# Altium PCB ArgoFC.PcbDoc (part 2 of 5)
Units mm, origin at the board's own origin, x right, y up, seen from the top; angles counter-clockwise.
Board outline 177.8 x 177.8 mm, 4 copper layers (Top Layer, GND Plane, PWR Plane, Bottom Layer), stack 0.603 mm thick; 373 components, 236 nets, 1289 pads, 686 vias.
Unrouted connection lines stored in the file: 16.
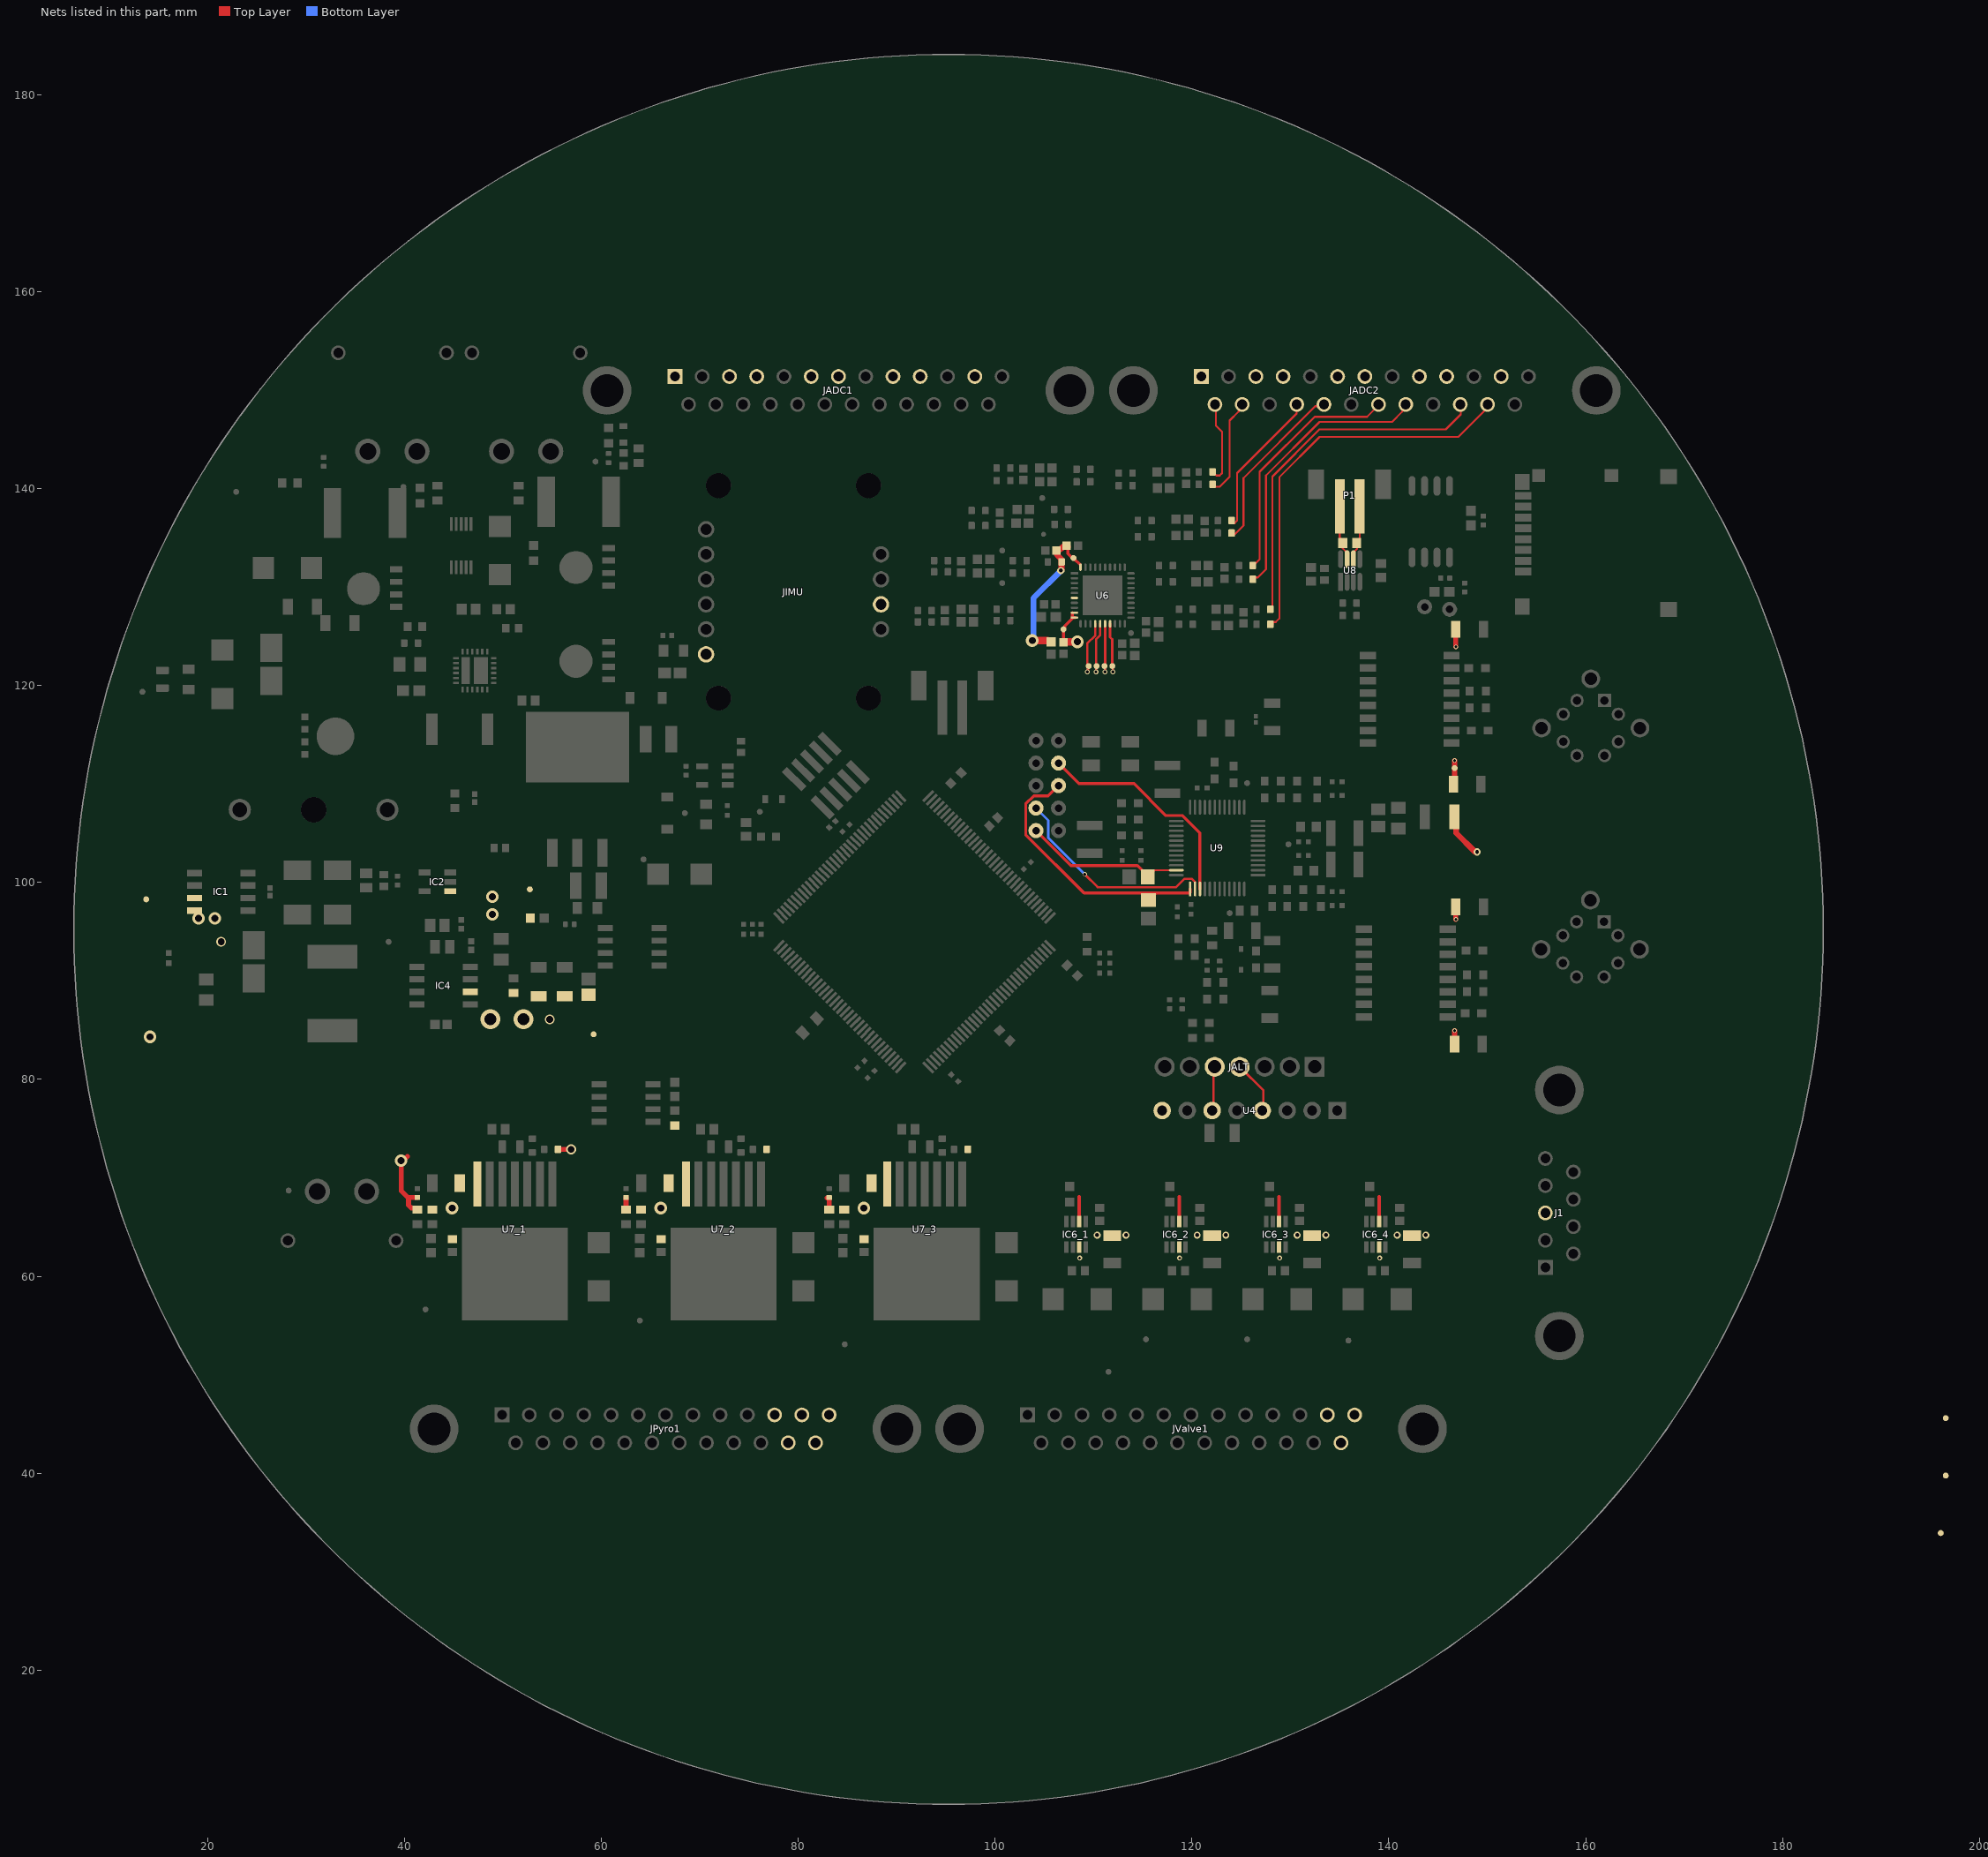
[diagram p4: the nets of this part, all layers, seen from the top]

## Footprints (in the part's own frame and the unit in brackets; to place one, negate y for a bottom-side part, rotate by r counter-clockwise, add the part's x,y. Pads: shape width x height; smd on the part's side, far side on the other; paste and mask are expansions set on the pad) (continued)
KTT0003B_N [mm] "D2-PAK, 3-Leads, Body 10.41x8.89mm, Pitch 2.54mm, IPC Medium Density"
  rect 2.85x1.05 smd: 1(-6.2,2.54) 2(-6.2,0) 3(-6.2,-2.54)
  rect 7.2x10.5 smd: 4(4.55,0)
  silkscreen extent -6.32,-5.2 0,5.2, body extent -6.78,-5.2 7.57,5.2, height 4.64
MCC-DO-214AB-2_V [mil] "Diode, 2-Leads, Body 6.18x6.1mm"
  rect 70x200 smd: 1(-130,0) 2(130,0)
  silkscreen extent -122,-120 185,120, body extent -122,-120 122,120, height 214
MCC-SOD123_V [mil] "SOD123, 2-Leads, Body 2.7x1.6mm, Height 1.35mm"
  rect 35.98x47.99 smd: 1(-64.5,0) 2(64.5,0)
  silkscreen extent 102,-31 102,31, body extent -53,-31 53,31, height 53
MCHP-SOIC-S2A8_M [mm] "SOIC, 8-Leads, Body 5.275x5.275mm, Pitch 1.27mm, IPC Low Density"
  oval 2x0.7 smd: 1(-3.625,1.905) 2(-3.625,0.635) 3(-3.625,-0.635) 4(-3.625,-1.905) 5(3.625,-1.905) 6(3.625,-0.635) 7(3.625,0.635) 8(3.625,1.905)
  silkscreen extent -3.75,-2.7 2.23,2.93, body extent -2.7,-2.7 2.7,2.7, height 2.16
MOLX-502774-0891_V [mm] "SMD, 14-Leads, Body 15x14.3mm, Pitch 1.1mm"
  rect 0.8x1.68 smd: 1(-2.9,7.385) 2(-1.8,7.385) 3(-0.7,7.385) 4(0.4,7.385) 5(1.5,7.385) 6(2.6,7.385) 7(3.7,7.385) 8(4.8,7.385)
  rect 1.29x1.3 smd: 9(6.855,5.825)
  rect 1.29x1.4 smd: 10(6.855,-1.575)
  rect 1.5x1.7 smd: 11(6.75,-7.375) 12(-6.75,-7.375)
  rect 1.7x1.5 smd: 13(-6.45,7.475)
  rect 1.6x1.5 smd: 14(6.21,7.475)
  silkscreen extent -7.15,-7.88 7.15,8.9, body extent -7.15,-8 7.15,8, height 1.78
ONSC-SOIC-8-751-07_V [mm] "SOIC, 8-Leads, Body 4.9x3.9mm, Pitch 1.27mm"
  rect 1.52x0.6 smd: 1(-2.74,1.905) 2(-2.74,0.635) 3(-2.74,-0.635) 4(-2.74,-1.905) 5(2.74,-1.905) 6(2.74,-0.635) 7(2.74,0.635) 8(2.74,1.905)
  silkscreen extent -2.87,-2.45 1.57,2.88, body extent -3,-2.5 3,2.5, height 1.75
QFP50P2200X2200X160-144N [mm]
  rect 1.475x0.3 smd: 1(-10.738,8.75) 2(-10.738,8.25) 3(-10.738,7.75) 4(-10.738,7.25) 5(-10.738,6.75) 6(-10.738,6.25) 7(-10.738,5.75) 8(-10.738,5.25) 9(-10.738,4.75) 10(-10.738,4.25) 11(-10.738,3.75) 12(-10.738,3.25) 13(-10.738,2.75) 14(-10.738,2.25) 15(-10.738,1.75) 16(-10.738,1.25) 17(-10.738,0.75) 18(-10.738,0.25) 19(-10.738,-0.25) 20(-10.738,-0.75) 21(-10.738,-1.25) 22(-10.738,-1.75) 23(-10.738,-2.25) 24(-10.738,-2.75) 25(-10.738,-3.25) 26(-10.738,-3.75) 27(-10.738,-4.25) 28(-10.738,-4.75) 29(-10.738,-5.25) 30(-10.738,-5.75) 31(-10.738,-6.25) 32(-10.738,-6.75) 33(-10.738,-7.25) 34(-10.738,-7.75) 35(-10.738,-8.25) 36(-10.738,-8.75) 73(10.738,-8.75) 74(10.738,-8.25) 75(10.738,-7.75) 76(10.738,-7.25) 77(10.738,-6.75) 78(10.738,-6.25) 79(10.738,-5.75) 80(10.738,-5.25) 81(10.738,-4.75) 82(10.738,-4.25) 83(10.738,-3.75) 84(10.738,-3.25) 85(10.738,-2.75) 86(10.738,-2.25) 87(10.738,-1.75) 88(10.738,-1.25) 89(10.738,-0.75) 90(10.738,-0.25) 91(10.738,0.25) 92(10.738,0.75) 93(10.738,1.25) 94(10.738,1.75) 95(10.738,2.25) 96(10.738,2.75) 97(10.738,3.25) 98(10.738,3.75) 99(10.738,4.25) 100(10.738,4.75) 101(10.738,5.25) 102(10.738,5.75) 103(10.738,6.25) 104(10.738,6.75) 105(10.738,7.25) 106(10.738,7.75) 107(10.738,8.25) 108(10.738,8.75)
  rect 0.3x1.475 smd: 37(-8.75,-10.738) 38(-8.25,-10.738) 39(-7.75,-10.738) 40(-7.25,-10.738) 41(-6.75,-10.738) 42(-6.25,-10.738) 43(-5.75,-10.738) 44(-5.25,-10.738) 45(-4.75,-10.738) 46(-4.25,-10.738) 47(-3.75,-10.738) 48(-3.25,-10.738) 49(-2.75,-10.738) 50(-2.25,-10.738) 51(-1.75,-10.738) 52(-1.25,-10.738) 53(-0.75,-10.738) 54(-0.25,-10.738) 55(0.25,-10.738) 56(0.75,-10.738) 57(1.25,-10.738) 58(1.75,-10.738) 59(2.25,-10.738) 60(2.75,-10.738) 61(3.25,-10.738) 62(3.75,-10.738) 63(4.25,-10.738) 64(4.75,-10.738) 65(5.25,-10.738) 66(5.75,-10.738) 67(6.25,-10.738) 68(6.75,-10.738) 69(7.25,-10.738) 70(7.75,-10.738) 71(8.25,-10.738) 72(8.75,-10.738) 109(8.75,10.738) 110(8.25,10.738) 111(7.75,10.738) 112(7.25,10.738) 113(6.75,10.738) 114(6.25,10.738) 115(5.75,10.738) 116(5.25,10.738) 117(4.75,10.738) 118(4.25,10.738) 119(3.75,10.738) 120(3.25,10.738) 121(2.75,10.738) 122(2.25,10.738) 123(1.75,10.738) 124(1.25,10.738) 125(0.75,10.738) 126(0.25,10.738) 127(-0.25,10.738) 128(-0.75,10.738) 129(-1.25,10.738) 130(-1.75,10.738) 131(-2.25,10.738) 132(-2.75,10.738) 133(-3.25,10.738) 134(-3.75,10.738) 135(-4.25,10.738) 136(-4.75,10.738) 137(-5.25,10.738) 138(-5.75,10.738) 139(-6.25,10.738) 140(-6.75,10.738) 141(-7.25,10.738) 142(-7.75,10.738) 143(-8.25,10.738) 144(-8.75,10.738)
  silkscreen extent -11.35,-9.65 9.65,9.65, body extent -10.95,-10.95 10.95,10.95, height 1.6
QTB-QBLP595_V [mm] "SMD, 2-Leads, Body 1x0.5mm"
  rrect25% 0.5x0.55 smd: 1(-0.455,0) 2(0.455,0)
  silkscreen extent -0.9,-0.2 -0.9,0.2, body extent -0.5,-0.25 0.5,0.25, height 0.5
RESC0402(1005)_L [mm] "Chip Resistor, Body 1.0x0.5mm, IPC High Density"
  rrect25% 0.5x0.55 smd: 1(-0.45,0) 2(0.45,0)
  silkscreen extent 0,-0.2 0,0.2, body extent -0.5,-0.25 0.5,0.25, height 0.3
RESC0603(1608)_L [mm] "Chip Resistor, Body 1.6x0.8mm, IPC High Density"
  rrect25% 0.66x0.76 smd: 1(-0.7,0) 2(0.7,0)
  silkscreen extent 0,-0.3 0,0.3, body extent -0.8,-0.4 0.8,0.4, height 0.45
RESC0805(2012)_L [mm] "Chip Resistor, Body 2.0x1.3mm, IPC High Density"
  rrect25% 0.76x1.3 smd: 1(-0.9,0) 2(0.89,0)
  silkscreen extent -0.3,-0.55 0.3,0.55, body extent -1,-0.62 1,0.63, height 0.6
RESC1608X55N [mm]
  rect 0.9x0.95 smd: 1(-0.8,0) 2(0.8,0)
  silkscreen extent 0,-0.3 0,0.3, body extent -0.8,-0.4 0.8,0.4, height 0.55
RESC1608X55X25ML10T15 [mm] "Chip Resistor, 2-Leads, Body 1.70x0.90mm, IPC Low Density"
  rect 0.8x1 smd: 1(-0.75,0) 2(0.75,0)
  body extent -0.85,-0.45 0.85,0.45, height 0.55
RESC1608X55X30ML20T20 [mm] "Chip Resistor, 2-Leads, Body 1.60x0.80mm, IPC Low Density"
  rect 1x1.1 smd: 1(-0.7,0) 2(0.7,0)
  body extent -0.9,-0.5 0.9,0.5, height 0.55
RESC1609X50X30LL10T20 [mm] "Chip Resistor, 2-Leads, Body 1.55x0.85mm, IPC High Density"
  rect 0.7x0.85 smd: 1(-0.575,0) 2(0.575,0)
  body extent -0.82,-0.48 0.82,0.48, height 0.5
RESC1609X50X30ML08T20 [mm] "Chip Resistor, 2-Leads, Body 1.65x0.95mm, IPC Low Density"
  rect 0.9x1.05 smd: 1(-0.7,0) 2(0.7,0)
  body extent -0.82,-0.48 0.82,0.48, height 0.5
RESC1609X50X30ML10T20 [mm] "Chip Resistor, 2-Leads, Body 1.55x0.85mm, IPC Low Density"
  rect 0.9x1.05 smd: 1(-0.675,0) 2(0.675,0)
  body extent -0.82,-0.48 0.82,0.48, height 0.5
RESC1609X55X30LL15T15 [mm] "Chip Resistor, 2-Leads, Body 1.75x0.95mm, IPC High Density"
  rect 0.75x0.85 smd: 1(-0.65,0) 2(0.65,0)
  body extent -0.87,-0.48 0.87,0.48, height 0.55
RESC2013X50X35ML15T15 [mm] "Chip Resistor, 2-Leads, Body 2.2x1.4mm, IPC Low Density"
  rect 1.2x1.5 smd: 1(-1.05,0) 2(1.05,0)
  silkscreen extent -0.05,-0.65 0.05,0.65, body extent -1.1,-0.7 1.1,0.7, height 0.5
RESC2013X60X40ML20T25 [mm] "Chip Resistor, 2-Leads, Body 2.00x1.25mm, IPC Low Density"
  rect 1.4x1.55 smd: 1(-0.95,0) 2(0.95,0)
  body extent -1.1,-0.72 1.1,0.72, height 0.6
RESC2013X70X40NL20T20 [mm] "Chip Resistor, 2-Leads, Body 2.00x1.25mm, IPC Medium Density"
  rect 1.15x1.45 smd: 1(-0.875,0) 2(0.875,0)
  body extent -1.1,-0.72 1.1,0.72, height 0.7
RHDR7W80P0X254_1X7_1828X254X870P [mm]
  rect 2.025x2.025 hole 1.35: 1(0,0)
  round 2.025 hole 1.35: 2(-2.54,0) 3(-5.08,0) 4(-7.62,0) 5(-10.16,0) 6(-12.7,0) 7(-15.24,0)
  silkscreen extent -17.11,-1.27 1.52,1.47, body extent -16.76,-1.27 1.52,1.27, height 8.7
SMTC-FTSH-105-01-L-DV-K_V [mm] "CONN, 10-Leads, Body 6.35x3.43mm, Pitch 1.27mm"
  rect 0.74x2.79 smd: 1(-2.54,-2.035) 2(-2.54,2.035) 3(-1.27,-2.035) 4(-1.27,2.035) 5(0,-2.035) 6(0,2.035) 7(1.27,-2.035) 8(1.27,2.035) 9(2.54,-2.035) 10(2.54,2.035)
  silkscreen extent -3.18,-4.1 3.18,0.34, body extent -3.17,-2.92 3.18,2.92, height 6.12
SOIC127P600X175-8N [mm]
  rect 1.525x0.65 smd: 1(-2.712,1.905) 2(-2.712,0.635) 3(-2.712,-0.635) 4(-2.712,-1.905) 5(2.712,-1.905) 6(2.712,-0.635) 7(2.712,0.635) 8(2.712,1.905)
  silkscreen extent -3.47,-2.45 1.6,2.58, body extent -3,-2.45 3,2.45, height 1.75
SOP50P490X110-10N [mm]
  rect 1.4x0.3 smd: 1(-2.2,1) 2(-2.2,0.5) 3(-2.2,0) 4(-2.2,-0.5) 5(-2.2,-1) 6(2.2,-1) 7(2.2,-0.5) 8(2.2,0) 9(2.2,0.5) 10(2.2,1)
  silkscreen extent -2.9,-1.5 1.15,1.5, body extent -2.45,-1.5 2.45,1.5, height 1.1
SOT65P280X100-8N [mm]
  rect 1.15x0.45 smd: 1(-1.3,0.975) 2(-1.3,0.325) 3(-1.3,-0.325) 4(-1.3,-0.975) 5(1.3,-0.975) 6(1.3,-0.325) 7(1.3,0.325) 8(1.3,0.975)
  silkscreen extent -1.88,-1.45 0.38,1.55, body extent -1.4,-1.45 1.4,1.45, height 1
SOT95P285X140-5N [mm]
  rect 1.2x0.6 smd: 1(-1.3,0.95) 2(-1.3,0) 3(-1.3,-0.95) 4(1.3,-0.95) 5(1.3,0.95)
  silkscreen extent -1.9,-1.48 0.35,1.5, body extent -1.43,-1.48 1.43,1.48, height 1.4
TP06R#1 [mm] "Testpoint, round, d=0.6mm"
  round 0.6 smd paste-1: 1(0,0)
TP06R#2 [mm] "Testpoint, round, d=0.6mm"
  round 0.5 smd paste-1: 1(0,0)
TP06R#3 [mm] "Testpoint, round, d=0.6mm"
  round 0.6 smd paste-1: 1(4.017,3.962)
TP06R#4 [mm] "Testpoint, round, d=0.6mm"
  round 0.6 smd paste-1: 1(0.842,-0.153)
TP06R#5 [mm] "Testpoint, round, d=0.6mm"
  round 0.6 smd paste-1: 1(1.731,0.19)
TP06R#6 [mm] "Testpoint, round, d=0.6mm"
  round 0.6 smd paste-1: 1(1.731,-3.696)
TPS259830ONRGER [mm]
  rect 0.575x0.24 smd: 1(-1.913,1.25) 2(-1.913,0.75) 3(-1.913,0.25) 4(-1.913,-0.25) 5(-1.913,-0.75) 6(-1.913,-1.25) 13(1.913,-1.25) 14(1.913,-0.75) 15(1.913,-0.25) 16(1.913,0.25) 17(1.913,0.75) 18(1.913,1.25)
  rect 0.24x0.575 smd: 7(-1.25,-1.913) 8(-0.75,-1.913) 9(-0.25,-1.913) 10(0.25,-1.913) 11(0.75,-1.913) 12(1.25,-1.913) 19(1.25,1.913) 20(0.75,1.913) 21(0.25,1.913) 22(-0.25,1.913) 23(-0.75,1.913) 24(-1.25,1.913)
  rect 2.7x1.45 smd: 25(0,0.625)
  rect 2.7x0.85 smd: 26(0,-0.925)
  silkscreen extent -2.7,-2 2,2, body extent -2.01,-2.01 2.01,2.01, height 0.9
XT30PWF [mm]
  round 2.55 hole 1.7: 1(0,0) 2(5,0)
  round 1.5 hole 1: 3(-3,5) 4(8,5)
  silkscreen extent -4.15,3 9.15,15, body extent -4.15,-0.96 9.15,13.93, height 5.21
XT30PWM [mm]
  round 2.55 hole 1.7: 1(-2.5,-5.912) 2(2.5,-5.912)
  round 1.5 hole 1: 3(5.5,4.088) 4(-5.5,4.088)
  silkscreen extent -4.95,-6.76 4.95,7.19, body extent -6.65,-6.71 6.65,7.24, height 5.06

## Part data
1: library part CMP-003-00019-2, "Ceramic SMD Crystal, 24 MHz, +/- 20 ppm, 18 pF, -20 to 70 degC, 4-Pin SMD, RoHS, Tape and Reel", Case/Package=CSMD, Frequency=24MHz, Frequency Tolerance=20ppm, Load Capacitance=18pF, Manufacturer=Abracon, Max Operating Temperature=70°C, Min Operating Temperature=-20°C, Package Description="4-Pin Surface Mount Device, Body 5 x 3.2 mm", Package Quantity=1000, Package Reference=ABM3B, Resistance=50Ohm, Datasheet URL=http://www.abracon.com/Resonators/abm3b.pdf, Datasheet Version=Aug-15, ESR=50, Manufacturer URL=http://www.abracon.com/, Mounting Technology=SM, Packaging=TapeandReel, Pins=4, RoHS Compliant=True, Tolerance=20ppm
BMS1: "Integrated Circuit", Manufacturer_Name="Analog Devices", Mouser Part Number=584-LTC4416EMS-1#PBF, Arrow Part Number=LTC4416EMS-1#PBF, Arrow Price/Stock=https://www.arrow.com/en/products/ltc4416ems-1pbf/analog-devices?region=nac, Datasheet Link=https://www.analog.com/media/en/technical-documentation/data-sheets/4416fa.pdf, Height=1.1mm, Manufacturer_Part_Number=LTC4416EMS-1#PBF, Mouser Price/Stock=https://www.mouser.co.uk/ProductDetail/Analog-Devices/LTC4416EMS-1PBF?qs=hVkxg5c3xu9mDay6QbsUoQ%3D%3D
C1 C2: library part CMP-001-00001-6, "Chip Capacitor, 0.1 uF, +/- 5%, 16 V, 0402 (1005 Metric)", Capacitor Type=Ceramic, Case/Package=0402, Max Operating Temperature=125°C, Min Operating Temperature=-55°C, Tolerance=5%, Voltage Rating=16V, Mounting Technology=SM, Pins=2, RoHS Compliant=True
C3 C7 C9 C10 C38: library part CMP-2000-07546-2, "Cap Ceramic 100nF 50V X7R 10% Pad SMD 0603 +125°C Automotive T/R", Case Code (Imperial)=0603, Case Code (Metric)=1608, Dielectric=X7R, Max Operating Temperature=125°C, Min Operating Temperature=-55°C, Package Quantity=1, Ratings=AEC-Q200, Tolerance=10%, Voltage=50V, Capacitance=100nF, Case/Package=0603, Composition=Ceramic, Depth=0.8mm, Height=0.8mm, Lead Free="Lead Free", Length=1.6mm, Mount="Surface Mount", Packaging="Tape and Reel", Radiation Hardening=No, REACH SVHC="No SVHC", Termination=SMD/SMT, Thickness=0.035inch, Voltage Rating=50V, Voltage Rating (DC)=50V, Weight=7.1E-05oz, Width=0.8mm
C4 C5 C13 C14: library part CMP-2000-05256-2, "CAP CER 10UF 50V X5R 1206", Manufacturer="Murata Electronics North America", Manufacturer Part Number=GRM31CR61H106KA12L, Package=GRM31-0.2, Temperature="-55°C to +85°C", Temperature Characteristic=X5R, Temperature Coefficient=15%, Temperature Range High=+85°C, Temperature Range Low=-55°C, Tolerance=10%, Voltage Rating=50V, Automotive=No, Capacitance=10uF, Category=Cap, ComponentLink2Description=Datasheet, ComponentLink2URL=https://search.murata.co.jp/Ceramy/image/img/A01X/G101/ENG/GRM31CR61H106KA12-01A.pdf, Device Class L1="Passive Components", Device Class L2=Capacitors, Device Class L3="Ceramic Capacitors", Digikey Description="CAP CER 10UF 50V X5R 1206", Height=1.8mm, Lead Free=Yes, Material=Ceramic, Mouser Description="Multilayer Ceramic Capacitors MLCC - SMD/SMT 1206 10uF 50volt X5R +/-10%", Octopart=https://octopart.com/grm31cr61h106ka12l-murata-18903335, RoHS=TRUE
C6: library part CMP-001-00082-4, "Chip Capacitor, 47µF +/-40%, 50V, 0805, Thickness 1.45 mm", Case/Package=0805, Max Operating Temperature=85°C, Min Operating Temperature=-55°C, Tolerance=10%, Voltage Rating=6.3V, Mounting Technology=SMT, Pins=2
C8 C55 C58 C59 C60 C62 C64 C65 C67 C68 C70 C75 C77 C78 C81 C84 C86 C87 C89: library part CMP-001-00017-6, "Chip Capacitor, 100 nF, +/- 10%, 50 V, 0603 (1608 Metric)", Capacitor Type=Ceramic, Case/Package=0603, Max Operating Temperature=125°C, Min Operating Temperature=-55°C, Tolerance=10%, Voltage Rating=50V, Mounting Technology=SM, Pins=2, RoHS Compliant=True
C11 C12: library part CMP-2000-06020-2, "CAP CER 47UF 16V X5R 1210", Case Code (Imperial)=1210, Case Code (Metric)=3225, Dielectric=X5R, Dielectric Material=Ceramic, Max Operating Temperature=85°C, Min Operating Temperature=-55°C, Package Quantity=1, Tolerance=20%, Voltage=16V, Capacitance=47uF, Case/Package=1210, Contact Plating=Tin, Depth=2.5mm, Dissipation Factor=10%, Height=2.5mm, Lead Free="Lead Free", Length=3.2mm, Mount="Surface Mount", Number of Pins=2, Packaging="Tape and Reel", Radiation Hardening=No, REACH SVHC="No SVHC", RoHS Compliant=Yes, Series=C, Termination=SMD/SMT, Thickness=0.11inch, Voltage Rating=16V, Voltage Rating (DC)=16V, Width=0.098inch
C15: library part CMP-2007-03708-1, "C0805F103K5RACTU 10000 pF ±10% 50V Ceramic Capacitor X7R 0805 (2012 Metric)", Manufacturer=Kemet, Part Number=C0805F103K5RACTU
C16 C17: library part CMP-2000-07294-2, "CAP TANT 100UF 10% 25V 2312", Capacitance=100uF, Case Code (Imperial)=2412, Case Code (Metric)=6032, Case/Package=6032-28, Dielectric Material=Tantalum, ESR (Equivalent Series Resistance)=100mR, Leakage Current=10uA, Max Operating Temperature=125°C, Min Operating Temperature=-55°C, Package Quantity=1, Tolerance=10%, Voltage=10V, Construction=Flat, Depth=3.2mm, Dissipation Factor=8%, Features="General Purpose", Height=2.6mm, Height - Seated (Max)=0.11inch, Lead Free="Lead Free", Lead Pitch=2.9mm, Length=6mm, Mount="Surface Mount", Number of Pins=2, Packaging="Tape and Reel", Polarity=Polar, Radiation Hardening=No, REACH SVHC="No SVHC", RoHS Compliant=Yes, Series=TPS, Size=2.6mm, Termination=SMD/SMT, Voltage Rating=10V, Voltage Rating (DC)=10V, Width=3.2mm
C18: library part CMP-2007-03453-2, "Chip Multilayer Ceramic Capacitors for General Purpose, 0805, 10uF, X5R, 15%, 10%, 25V", Case Code (Imperial)=0805, Case Code (Metric)=2012, Dielectric=X5R, Max Operating Temperature=85°C, Min Operating Temperature=-55°C, Package Quantity=1, Tolerance=10%, Voltage=16V, Capacitance=10uF, Case/Package=0805, Depth=1.25mm, Height=1.25mm, Lead Free="Lead Free", Length=2mm, Material=Ceramic, Mount="Surface Mount", Packaging="Tape and Reel", Radiation Hardening=No, REACH SVHC="No SVHC", Termination=SMD/SMT, Thickness=0.053inch, Voltage Rating=16V, Voltage Rating (DC)=16V, Width=1.25mm
C19: library part CMP-2006-03275-2, "C0603C 820pF Ceramic Multilayer Capacitor; 50 VDC; +125degC; X7R Dielec; +/-10%", Capacitance="820 pF", Manufacturer=KEMET, Manufacturer Part Number=C0603C821K5RACTU, Package=C0603C-CF, Temperature="-55°C to +125°C", Temperature Characteristic=X7R, Temperature Coefficient=30ppm/°C, Temperature Range High=+125°C, Temperature Range Low=-55°C, Tolerance=0.1, Voltage Rating="50 V", Automotive=Yes, Automotive Grade="Grade 1", Category=Cap, ComponentLink2Description=Datasheet, ComponentLink2URL=https://api.kemet.com/component-edge/download/datasheet/C0603C100J5GACAUTO.pdf, Device Class L1="Passive Components", Device Class L2=Capacitors, Device Class L3="Ceramic Capacitors", Digikey Description="C0603C 820pF Ceramic Multilayer Capacitor; 50 VDC; +125degC; X7R Dielec; +/-10%", Height=0.87mm, Lead Free=Yes, Material=Ceramic, Mouser Description="C0603C 820pF Ceramic Multilayer Capacitor, 50 VDC, +125degC, X7R Dielec, +/-10%", Octopart=https://octopart.com/c0603c821k5ractu-kemet-129686, RoHS=TRUE
C20: library part CMP-2007-00462-2, "CAP CER 10PF 50V 10% NP0 0805C0805C100K5GACTU", Capacitance="10 pF", Manufacturer=KEMET, Manufacturer Part Number=C0805C100K5GACTU, Package=C0805C-DN, Temperature="-55°C to +125°C", Temperature Characteristic=C0G, Temperature Coefficient=30ppm/°C, Temperature Range High=+125°C, Temperature Range Low=-55°C, Tolerance=0.1, Voltage Rating="50 V", Automotive=No, Category=Cap, ComponentLink2Description=Datasheet, ComponentLink2URL=https://content.kemet.com/datasheets/KEM_C1003_C0G_SMD.pdf, Device Class L1="Passive Components", Device Class L2=Capacitors, Device Class L3="Ceramic Capacitors", Digikey Description="CAP CER 10PF 50V 10% NP0 0805", Height=0.88mm, Ipc Land Pattern Name=CAPC200125X78, Lead Free=Yes, Material=Ceramic, Mouser Description="Multilayer Ceramic Capacitors MLCC - SMD/SMT 50volts 10pF C0G 10%", Octopart=https://octopart.com/c0805c100k5gactu-kemet-8089747, RoHS=TRUE
C21: library part CMP-2008-03950-1, "GRM155R71C822KA01D 0402  8.2nF", Manufacturer=Murata, Part Number=GRM155R71C822KA01D
C22: library part CMP-13271-001564-1, "CL21 Series 0805 2.2nF 50V ±5% Tolerance C0G Multilayer Ceramic Chip Capacitor CL21C222JBFNNNE", Case Code (Imperial)=0805, Case Code (Metric)=2012, Dielectric=C0G, Max Operating Temperature=125°C, Min Operating Temperature=-55°C, Package Quantity=2000, Tolerance=5%, Voltage=50V, Capacitance=2.2nF, Case/Package=0805, Depth=1.25mm, Height=1.25mm, Lead Free="Lead Free", Length=2mm, Mount="Surface Mount", Packaging="Tape and Reel", Radiation Hardening=No, Thickness=0.053inch, Voltage Rating=50V, Voltage Rating (DC)=50V, Width=0.049inch
C25 C26 C27 C28 C29 C30 C31 C32 C33 C34 C35 C36: library part CMP-03422-000048-1, "CAP CER 0.1UF 16V X7R 0402", Capacitance="100 nF", Manufacturer=YAGEO, Manufacturer Part Number=CC0402KRX7R7BB104, Package=CC0402, Temperature="-55°C to +125°C", Temperature Characteristic=X7R, Temperature Coefficient=30ppm/°C, Temperature Range High=+125°C, Temperature Range Low=-55°C, Tolerance=0.1, Voltage Rating="16 V", Automotive=No, Automotive Grade=NA, Category=Cap, ComponentLink2Description=Datasheet, ComponentLink2URL=http://www.yageo.com/documents/recent/UPY-GP_NP0_16V-to-50V_16.pdf, Device Class L1="Passive Components", Device Class L2=Capacitors, Device Class L3="Ceramic Capacitors", Digikey Description="CAP CER 0.1UF 16V X7R 0402", Footprint Url=http://www.yageo.com/exep/pages/download/literatures/UPY-C_GEN_24.pdf, Height=0.55mm, Ipc Land Pattern Name=CAPC10050X50, Lead Free=Yes, Material=Ceramic, Mouser Description="0402 0.1 uF 16 V ±10 % Tolerance X7R SMT Multilayer Ceramic Capacitor", Octopart=https://octopart.com/cc0402krx7r7bb104-yageo-42244624, RoHS=TRUE
C37 C43_1 C43_2: library part CMP-03422-000441-1, "CAP CER 2.2UF 10V X5R 0603", Capacitance="2.2 uF", Manufacturer=YAGEO, Manufacturer Part Number=CC0603MRX5R6BB225, Package=CC0603-DA, Temperature="-55°C to +125°C", Temperature Characteristic=X5R, Temperature Coefficient=15%, Temperature Range High=+125°C, Temperature Range Low=-55°C, Tolerance=0.2, Voltage="10 V", Automotive=No, Category=Cap, ComponentLink2Description=Datasheet, ComponentLink2URL=http://www.yageo.com/documents/recent/UPY-GPHC_X7R_6.3V-to-50V_18.pdf, Device Class L1="Passive Components", Device Class L2=Capacitors, Device Class L3="Ceramic Capacitors", Digikey Description="CAP CER 2.2UF 10V X5R 0603", Footprint Url=http://www.yageo.com/exep/pages/download/literatures/UPY-C_GEN_24.pdf, Height=0.9mm, Lead Free=Yes, Material=Ceramic, Mouser Description="Multilayer Ceramic Capacitors MLCC - SMD/SMT 2.2uF 10V X5R 20%", Octopart=https://octopart.com/cc0603mrx5r6bb225-yageo-40952238, RoHS=TRUE, Voltage Rating="10 V"
C39 C94: library part CMP-1035-00158-3, "CAP CER 2.2PF 50V NP0 0603", Capacitance="2.2 pF", Manufacturer=KEMET, Manufacturer Part Number=C0603C229C5GACTU, Package=C0603C-CF, Temperature="-55°C to +125°C", Temperature Characteristic=C0G, Temperature Coefficient=30ppm/°C, Temperature Range High=+125°C, Temperature Range Low=-55°C, Tolerance="0.25 pF", Voltage Rating="50 V", Automotive=Yes, Automotive Grade="Grade 1", Category=Cap, ComponentLink2Description=Datasheet, ComponentLink2URL=https://api.kemet.com/component-edge/download/datasheet/C0603C100J5GACAUTO.pdf, Device Class L1="Passive Components", Device Class L2=Capacitors, Device Class L3="Ceramic Capacitors", Digikey Description="CAP CER 2.2PF 50V NP0 0603", Height=0.87mm, Lead Free=Yes, Material=Ceramic, Mouser Description="Multilayer Ceramic Capacitors MLCC - SMD/SMT 50volts 2.2pF C0G 0.25%", Octopart=https://octopart.com/c0603c229c5gactu-kemet-3874912, RoHS=TRUE
C40: library part CMP-03422-000441-1, "CAP CER 2.2UF 10V X5R 0603", Capacitance="2.2 uF", Manufacturer=YAGEO, Package=CC0603-DA, Temperature="-55°C to +125°C", Temperature Characteristic=X5R, Temperature Coefficient=15%, Temperature Range High=+125°C, Temperature Range Low=-55°C, Tolerance=0.2, Voltage="10 V", Automotive=No, Category=Cap, ComponentLink2Description=Datasheet, ComponentLink2URL=http://www.yageo.com/documents/recent/UPY-GPHC_X7R_6.3V-to-50V_18.pdf, Device Class L1="Passive Components", Device Class L2=Capacitors, Device Class L3="Ceramic Capacitors", Digikey Description="CAP CER 2.2UF 10V X5R 0603", Footprint Url=http://www.yageo.com/exep/pages/download/literatures/UPY-C_GEN_24.pdf, Height=0.9mm, Lead Free=Yes, Manufacturer Part Number=CC0603MRX5R6BB225, Material=Ceramic, Mouser Description="Multilayer Ceramic Capacitors MLCC - SMD/SMT 2.2uF 10V X5R 20%", Octopart=https://octopart.com/cc0603mrx5r6bb225-yageo-40952238, RoHS=TRUE, Voltage Rating="10 V"
C48 C50: library part CMP-001-00065-4, "Chip Capacitor, 100nF +/-20%, 25V, 0402, Thickness 0.6 mm", Case/Package=0402, Max Operating Temperature=85°C, Min Operating Temperature=-55°C, Tolerance=10%, Voltage Rating=25V, Mounting Technology=SMT, Pins=2
C49 C51 C72 C74: library part CMP-001-00003-6, "Chip Capacitor, 1 uF, +/- 10%, 16 V, 0603 (1608 Metric)", Capacitor Type=Ceramic, Case/Package=0603, Max Operating Temperature=125°C, Min Operating Temperature=-55°C, Tolerance=10%, Voltage Rating=16V, Mounting Technology=SM, Pins=2, RoHS Compliant=True
C52_1 C52_2 C52_3 C52_4 C54_1 C54_2 C54_3 C54_4 C92_1 C92_2 C92_3: library part CC0603KRX7R9BB104, "Capacitor,0603, 50V", Manufacturer_Name=YAGEO, Mouser Part Number=603-CC603KRX7R9BB104, Arrow Part Number=CC0603KRX7R9BB104, Arrow Price/Stock=https://www.arrow.com/en/products/cc0603krx7r9bb104/yageo?utm_currency=USD&region=europe, Datasheet Link=https://componentsearchengine.com/Datasheets/2/CC0603KRX7R9BB104.pdf, Height=0.9mm, Manufacturer_Part_Number=CC0603KRX7R9BB104, Mouser Price/Stock=https://www.mouser.co.uk/ProductDetail/YAGEO/CC0603KRX7R9BB104?qs=vTakOoo5QyLvVCYM2ge8LQ%3D%3D
C55_1 C55_2 C55_3 C55_4 C91_1 C91_2 C91_3: library part CL31B105KBHNNNE, "1uF,1206, 50v", Manufacturer_Name=SAMSUNG, Mouser Part Number=187-CL31B105KBHNNNE, Arrow Part Number=CL31B105KBHNNNE, Arrow Price/Stock=https://www.arrow.com/en/products/cl31b105kbhnnne/samsung-electro-mechanics?utm_currency=USD&region=europe, Datasheet Link=https://datasheet.datasheetarchive.com/originals/distributors/Datasheets_SAMA/5cd9a1c15dad09a7278f50cb1a2e4a6e.pdf, Height=1.8mm, Manufacturer_Part_Number=CL31B105KBHNNNE, Mouser Price/Stock=https://www.mouser.co.uk/ProductDetail/Samsung-Electro-Mechanics/CL31B105KBHNNNE?qs=349EhDEZ59oPJzVuH4J5mw%3D%3D
C56 C57 C61 C63 C66 C69 C71 C73 C76 C79 C80 C83 C85 C88: library part CMP-001-00005-6, "Chip Capacitor, 1 uF, +/- 10%, 25 V, 0603 (1608 Metric)", Capacitor Type=Ceramic, Case/Package=0603, Max Operating Temperature=125°C, Min Operating Temperature=-55°C, Tolerance=10%, Voltage Rating=25V, Mounting Technology=SM, Pins=2, RoHS Compliant=True
C82: library part CMP-001-00076-4, "Chip Capacitor, 4.7µF +/-20%, 10V, 0603, Thickness 1 mm", Case/Package=0603, Max Operating Temperature=85°C, Min Operating Temperature=-55°C, Tolerance=10%, Voltage Rating=10V, Mounting Technology=SMT, Pins=2
C92 C93: library part CMP-001-00075-6, "Chip Capacitor, 10µF +/-20%, 10V, 0603, Thickness 1 mm", Case/Package=0603, Max Operating Temperature=85°C, Min Operating Temperature=-55°C, Tolerance=10%, Voltage Rating=10V, Mounting Technology=SMT, Pins=2
C97 C101 C103 C104 C105 C107 C108 C112 C113 C117 C118: library part CMP-03422-000748-1, "CAP CER 0.1UF 10V X7R 0402", Capacitance="100 nF", Manufacturer=YAGEO, Manufacturer Part Number=CC0402KRX7R6BB104, Package=CC0402, Temperature="-55°C to +125°C", Temperature Characteristic=X7R, Temperature Coefficient=30ppm/°C, Temperature Range High=+125°C, Temperature Range Low=-55°C, Tolerance=0.1, Voltage Rating="10 V", Automotive=No, Automotive Grade=NA, Category=Cap, ComponentLink2Description=Datasheet, ComponentLink2URL=http://www.yageo.com/documents/recent/UPY-GP_NP0_16V-to-50V_16.pdf, Device Class L1="Passive Components", Device Class L2=Capacitors, Device Class L3="Ceramic Capacitors", Digikey Description="CAP CER 0.1UF 10V X7R 0402", Footprint Url=http://www.yageo.com/exep/pages/download/literatures/UPY-C_GEN_24.pdf, Height=0.55mm, Ipc Land Pattern Name=CAPC10050X50, Lead Free=Yes, Material=Ceramic, Mouser Description="Multilayer Ceramic Capacitors MLCC - SMD/SMT 100nF 10V X7R 10%", Octopart=https://octopart.com/cc0402krx7r6bb104-yageo-8376509, RoHS=TRUE
C98 C100 C102 C106: library part CMP-1038-02268-1, "CAP 22uF 10V ±10% 1210 (3225 Metric) Thickness 2.8mm SMD", Case-EIA=1210, Case-Metric=3225, Rated Voltage="10 V", Tolerance=Â±10%, Max Thickness="2.8 mm", Technology=SMT
C99 C109 C110 C111 C114: library part CMP-1037-04967-1, "CAP 10uF 10V ±10% 1206 (3216 Metric) Thickness 1.9mm SMD", Case-EIA=1206, Case-Metric=3216, Rated Voltage="10 V", Tolerance=Â±10%, Max Thickness="1.9 mm", Technology=SMT
C115 C116 C119 C120: library part CMP-03020-034681-1, "CAP CER 1000PF 2KV X7R 1206", Capacitance=1nF, Case Code (Imperial)=1206, Case Code (Metric)=3216, Dielectric=X7R, Dielectric Material=Ceramic, Max Operating Temperature=125°C, Min Operating Temperature=-55°C, Package Quantity=1, Tolerance=10%, Voltage=2kV, Voltage Rating (DC)=2.5kV, Case/Package=1206, Construction=Flat, Depth=1.6mm, Dissipation Factor=2.5%, Height=1.6mm, Length=3.2mm, Mount="Surface Mount", Number of Pins=2, Packaging="Tape and Reel", Radiation Hardening=No, REACH SVHC="No SVHC", RoHS Compliant=Yes, Series=C, Termination=SMD/SMT, Thickness=0.069inch, Voltage Rating=2kV, Width=0.063inch
C121: library part CMP-2010-00236-1, Manufacturer="AVX Interconnect / Elco", Part Number=0201ZD103KAT2A
CC1: library part CMP-1038-01657-2, "General Purpose Ceramic Capacitor, 1210, 100nF, 10%, X7R, +15%, 50V", Case Code (Imperial)=1210, Case Code (Metric)=3225, Dielectric=X7R, Insulation Resistance=100GR, Max Operating Temperature=125°C, Min Operating Temperature=-55°C, Package Quantity=1, Tolerance=10%, Voltage=50V, Capacitance=100nF, Case/Package=1210, Construction=Flat, Depth=2.5mm, Dissipation Factor=2.5%, Height=0.94mm, Lead Free="Lead Free", Length=3.2mm, Mount="Surface Mount", Number of Pins=2, Packaging="Tape and Reel", REACH SVHC="No SVHC", RoHS Compliant=Yes, Series=-, Termination=SMD/SMT, Thickness=0.037inch, Voltage Rating=50V, Voltage Rating (DC)=50V, Width=0.098inch
CD1: library part CMP-2000-05248-1, "Micro SD Memory Card Connector, 0.5 A, 10 V (DC), -25 to 85 degC, 8-Pin SMT, RoHS, Tape and Reel", Manufacturer=Molex, Standard Package=1, 3D Model=502774-0891.stp, Card Type=SecureDigital-microSD™, Catalog Drawings=502774-0891, Category=Connectors,Interconnects, Connector Type=ConnectorandEjector, Contact Finish=Gold, Contact Finish Thickness=20µin(0.51µm), Datasheet URL=https://datasheet.ciiva.com/1104/1499551-1104671.pdf, Datasheet Version="Rev. D, 04/2004", Ejector Side=-, Family=MemoryConnectors-PCCardSockets, Features=Switch, Height Above Board="0.071\"(1.80mm)", Insertion, Removal Method=PushIn,PushOut, Manufacturer URL=http://www.molex.com/, Mounting Feature=Reverse-Bottom, Mounting Type=SurfaceMount,RightAngle, Number of Positions=10(8+2), Online Catalog=microSD™Series, Other Names=WM24066DKR, Packaging=Digi-Reel, RoHS Information=502774-0891CertofCompliance, Series=502774
Cg1: library part CMP-03422-000635-2, "CAP CER 470pF 50V X7R 0603", Capacitance=3.9nF, Case Code (Imperial)=0603, Case Code (Metric)=1608, Dielectric=X7R, Dielectric Material=Ceramic, Insulation Resistance=100GR, Max Operating Temperature=125°C, Min Operating Temperature=-55°C, Package Quantity=4000, Tolerance=10%, Voltage=50V, Case/Package=0603, Construction=Flat, Depth=0.8mm, Halogen Free="Halogen Free", Height=0.8mm, Lead Free="Lead Free", Length=1.6mm, Mount="Surface Mount", Number of Pins=2, Packaging="Tape and Reel", Radiation Hardening=No, REACH SVHC="No SVHC", Resistor Type=Ceramic, RoHS Compliant=Yes, Series=CC, Termination=SMD/SMT, Thickness=0.035inch, Voltage Rating=50V, Voltage Rating (DC)=50V, Width=0.8mm
Citimer1: library part CMP-03422-000635-2, "CAP CER 3900PF 50V X7R 0603", Case Code (Imperial)=0603, Case Code (Metric)=1608, Dielectric=X7R, Dielectric Material=Ceramic, Insulation Resistance=100GR, Max Operating Temperature=125°C, Min Operating Temperature=-55°C, Package Quantity=4000, Tolerance=10%, Voltage=50V, Capacitance=3.9nF, Case/Package=0603, Construction=Flat, Depth=0.8mm, Halogen Free="Halogen Free", Height=0.8mm, Lead Free="Lead Free", Length=1.6mm, Mount="Surface Mount", Number of Pins=2, Packaging="Tape and Reel", Radiation Hardening=No, REACH SVHC="No SVHC", Resistor Type=Ceramic, RoHS Compliant=Yes, Series=CC, Termination=SMD/SMT, Thickness=0.035inch, Voltage Rating=50V, Voltage Rating (DC)=50V, Width=0.8mm
CRetry1: library part CMP-2006-04378-2, "General Purpose Ceramic Capacitor, 0603, 1nF, 10%, X7R, 15%, 50V", Case Code (Imperial)=0603, Case Code (Metric)=1608, Dielectric=X7R, Dielectric Material=Ceramic, Max Operating Temperature=125°C, Min Operating Temperature=-55°C, Package Quantity=4000, Tolerance=10%, Voltage=50V, Capacitance=1nF, Case/Package=0603, Construction=Flat, Contact Plating=Tin, Depth=0.81mm, Height=0.9mm, Lead Free="Lead Free", Length=1.6mm, Mount="Surface Mount", Number of Pins=2, Packaging="Tape and Reel", Radiation Hardening=No, REACH SVHC="No SVHC", RoHS Compliant=Yes, Series=-, Termination=SMD/SMT, Thickness=0.035inch, Voltage Rating=50V, Voltage Rating (DC)=50V, Weight=7.1E-05oz, Width=0.032inch
D1 D7_1 D7_2 D7_3 D8_1 D8_2 D8_3 D8_4 D9 D12: library part CMP-08607-000081-1, "TVS DIODE 28V 45.4V DO214AA", Breakdown Voltage=31.1V, Clamping Voltage=45.4V, Manufacturer="Littelfuse Inc", Max Junction Temp=+150°C, Package=SMBJ, Peak Pulse Current=13.3A, Peak Pulse Power=600W, Reverse Standoff Voltage=28V, Temperature="-65°C to +150°C", Temperature Range Low=-65°C, Automotive=No, Category=Diode, ComponentLink2Description=Datasheet, ComponentLink2URL=https://www.littelfuse.com/~/media/electronics/datasheets/tvs_diodes/littelfuse_tvs_diode_smbj_datasheet.pdf.pdf, Device Class L1="Circuit Protection", Device Class L2="TVS Diodes", Device Class L3=unset, Digikey Description="TVS DIODE 28V 45.4V DO214AA", Direction=Unidirectional, Height=2.61mm, Lead Free=Yes, Manufacturer Part Number=SMBJ28A, Mouser Description="Littelfuse SMBJ28A, Uni-Directional TVS Diode, 600W, 2-Pin DO-214AA", Number of Channels=1, Octopart=https://octopart.com/smbj28a-littelfuse-350790, RoHS=TRUE, Temperature Range High=+150°C
D2 D4: library part CMP-004-00005-2, "Schottky Barrier Rectifier, 40 V, 1 A, -65 to 125 degC, 2-Pin SOD123, RoHS, Tape and Reel", Case/Package=SOD123, Manufacturer="Micro Commercial Components", Package Description="2-Pin Small Outline Diode, Body 2.7 x 1.6 mm, Height 1.35 mm", Datasheet URL=http://www.mccsemi.com/up_pdf/B5817W-B5819W(SOD-123).pdf, Datasheet Version="Rev. B, 01/2013", Manufacturer URL=http://www.mccsemi.com/, Mounting Technology=SM, Package Reference=SOD123, Package URL=http://www.mccsemi.com/up_pdf/1N4448W(SOD-123).pdf, RoHS Compliant=Unknown
D3: "TVS Diode (Uni-directional)", Manufacturer_Name=STMicroelectronics, Mouser Part Number=511-SM6T7V5A, Arrow Part Number=SM6T7V5A, Arrow Price/Stock=https://www.arrow.com/en/products/sm6t7v5a/stmicroelectronics?region=nac, Datasheet Link=https://www.st.com/resource/en/datasheet/sm6t100a.pdf, Height=2.65mm, Manufacturer_Part_Number=SM6T7V5A, Mouser Price/Stock=https://www.mouser.co.uk/ProductDetail/STMicroelectronics/SM6T7V5A?qs=DcAdhm6iCnod0UVazzWDng%3D%3D
D5 D11: library part CMP-20229-000003-1, "DIODE ZENER 3.3V 150MW 0603", Case/Package=SMD/SMT, Max Operating Temperature=125°C, Max Power Dissipation=150mW, Max Reverse Leakage Current=25uA, Min Operating Temperature=-55°C, Output Current=500mA, Package Quantity=1, Tolerance=5%, Voltage Rating (DC)=3.3V, Zener Current=5mA, Element Configuration=Single, Impedance=95R, Lead Free="Lead Free", Mount="Surface Mount", Packaging="Tape and Reel", Power Dissipation=150mW, Power Rating=150mW, Voltage Tolerance=5%, Zener Voltage=3.3V
D6 D10: library part CMP-004-00006-2, "Schottky Barrier Rectifier, 40 V, 5 A, -55 to 150 degC, 2-Pin SMD", Case/Package=SMB-2, Manufacturer=JCET, Package Description="2-Pin Surface Mount Device, Body 4.315 x 3.62 mm", Datasheet URL=http://wiki.seeedstudio.com/images/3/3f/0310130P1.pdf, Datasheet Version=May-13, Manufacturer URL=http://www.cj-elec.com/, Mounting Technology=SM, Package Reference=SMB-2, RoHS Compliant=Unknown
D7: library part CMP-1674-00011-2, "LED RED CLEAR CHIP SMD", Case Code (Imperial)=0603, Case Code (Metric)=1608, Color=Red, Forward Current=30mA, Forward Voltage=2.4V, Lens Color=Colorless, Max Operating Temperature=85°C, Min Operating Temperature=-55°C, Package Quantity=1, Power Dissipation=75mW, Reverse Voltage=5V, Test Current=20mA, Case/Package=0603, Depth=0.8mm, Dominant Wavelength=631nm, Height=0.8mm, Illumination Color=Red, Lead Free="Lead Free", Length=1.6mm, Lens Style=Diffused, Lens Transparency=Clear, Luminous Intensity=54mcd, Mount="Surface Mount", Number of Elements=1, Number of LEDs=1, Number of Pins=2, Packaging="Tape and Reel", Power Rating=75mW, Radiation Hardening=No, Viewing Angle=130°, Wavelength=639nm, Width=0.8mm
D14: library part CMP-004-00002-2, "Fast Switching Diode, 75 V, 0.3 A, -65 to 150 degC, 2-Pin SOD323, RoHS, Tape and Reel", Case/Package=SOD, Forward Current=300mA, Forward Voltage=1.25V, Manufacturer="Diodes Inc", Max Operating Temperature=150°C, Max Surge Current=2A, Min Operating Temperature=-65°C, Package Description="2-Pin Small Outline Diode, Body 1.7 x 1.3 mm", Package Quantity=3000, Package Reference=SOD323-2, Peak Reverse Current=1uA, Datasheet URL=http://www.diodes.com/datasheets/ds30097.pdf, Datasheet Version="Rev. 25-2, 03/2016", Elements=1, Manufacturer URL=http://www.diodes.com/, Mounting Technology=SM, Packaging=TapeandReel, Pins=2, Recovery Time=4ns, RoHS Compliant=True
DQ1 DQ2: library part CMP-2000-05214-1, "Schottky Rectifier, 40 V, 10 A, -55 to 125 degC, 2-Pin SMD, RoHS, Tape and Reel", Forward Continuous Current=10A, Manufacturer="Micro Commercial Components", Max Surge Current=250A, Maximum Reverse Leakage Current=1mA, Operating Temperature Range=-55Cto+125C, Package / Case=DO-214AB, Peak Reverse Voltage=40V, Datasheet URL=https://datasheet.ciiva.com/4718/sk102-sk1010hsmc-27683-4718371.pdf, Datasheet Version="Rev. B, 05/2012", Manufacturer URL=http://www.mccsemi.com/, Mounting Style=SMD/SMT, Packaging=Reel, Product=SchottkyRectifiers, RoHS=Details
FB1 FB2: "Ferrite Bead", Manufacturer_Name=SUNLORD, Datasheet Link=https://datasheet.lcsc.com/szlcsc/Sunlord-GZ1608D601TF_C1002.pdf, Height=0.95mm, Manufacturer_Part_Number=GZ1608D601TF
IC1: "Integrated Circuit, –2.8 A → 27.7 A / https://www.ti.com/lit/ds/symlink/tmcs1108-q1.pdf?HQS=dis-dk-null-digikeymode-dsf-pf-null-wwe&ts=1751879552762", Manufacturer_Name="Texas Instruments", Mouser Part Number=595-TMCS1108A2UQDR, Arrow Part Number=TMCS1108A2UQDR, Arrow Price/Stock=https://www.arrow.com/en/products/tmcs1108a2uqdr/texas-instruments?region=nac, Datasheet Link=https://www.ti.com/lit/ds/symlink/tmcs1108.pdf?HQS=dis-dk-null-digikeymode-dsf-pf-null-wwe&ts=1716768799776, Height=1.75mm, Manufacturer_Part_Number=TMCS1108A2UQDR, Mouser Price/Stock=https://www.mouser.co.uk/ProductDetail/Texas-Instruments/TMCS1108A2UQDR?qs=pUKx8fyJudDyYFsofofVeQ%3D%3D
IC2 IC3: "Integrated Circuit", Manufacturer_Name=Silergy, Datasheet Link=https://datasheet.lcsc.com/szlcsc/Silergy-Corp-SY6280AAAC_C207620.pdf, Height=1.4mm, Manufacturer_Part_Number=SY6280AAAC
IC4: "Integrated Circuit", Manufacturer_Name="Texas Instruments", Mouser Part Number=595-TPS54331DR, Arrow Part Number=TPS54331DR, Arrow Price/Stock=https://www.arrow.com/en/products/tps54331dr/texas-instruments?utm_currency=USD&region=nac, Datasheet Link=http://www.ti.com/lit/gpn/tps54331, Height=1.75mm, Manufacturer_Part_Number=TPS54331DR, Mouser Price/Stock=https://www.mouser.co.uk/ProductDetail/Texas-Instruments/TPS54331DR?qs=QyYHynRG50rsSYcB%2Ftz4Yw%3D%3D
IC5: "Integrated Circuit / https://www.allelcoelec.com/productdetails/STMicroelectronics/STM32H743ZIT6.html?gad_source=1&gad_campaignid=21002909653&gclid=CjwKCAjw4efDBhATEiwAaDBpbvLpcbmne3WKOXgEcIaqaVpz5lcgSvxb9vCyHUjI6dfgnmkW9JZCHhoCY-cQAvD_BwE", Manufacturer_Name=STMicroelectronics, Mouser Part Number=511-STM32H743ZIT6, Arrow Part Number=STM32H743ZIT6, Arrow Price/Stock=https://www.arrow.com/en/products/stm32h743zit6/stmicroelectronics?utm_currency=USD&region=nac, Datasheet Link=https://www.st.com/resource/en/datasheet/stm32h743zi.pdf, Height=1.6mm, Manufacturer_Part_Number=STM32H743ZIT6, Mouser Price/Stock=https://www.mouser.co.uk/ProductDetail/STMicroelectronics/STM32H743ZIT6?qs=FNcb6ahWXRyuf15GdgTu%252Bw%3D%3D
IC6_1 IC6_2 IC6_3 IC6_4: library part CMP-031-00027-1, "Integrated Circuit", Manufacturer_Name="Monolithic Power Systems (MPS)", Datasheet Link=https://www.monolithicpower.com/en/documentview/productdocument/index/version/2/document_type/Datasheet/lang/en/sku/MPQ6610-AEC1/document_id/9806/, Design Item ID=MPQ6610GJ-AEC1-P, Height=1mm, Manufacturer_Part_Number=MPQ6610GJ-AEC1-P, Source=SamacSys.SchLib
IC7: "Integrated Circuit", Manufacturer_Name="Texas Instruments", Mouser Part Number=595-TPS259830ONRGER, Arrow Part Number=TPS259830ONRGER, Arrow Price/Stock=https://www.arrow.com/en/products/tps259830onrger/texas-instruments?utm_currency=USD&region=nac, Datasheet Link=https://www.ti.com/lit/gpn/tps25983, Height=1mm, Manufacturer_Part_Number=TPS259830ONRGER, Mouser Price/Stock=https://www.mouser.co.uk/ProductDetail/Texas-Instruments/TPS259830ONRGER?qs=ST9lo4GX8V2yYPVZTyti6w%3D%3D
J1: library part CMP-1502-00276-1, "Male PCB Connector WR-DSUB, Vertical, 9 pins", Contact Resistance=30mOhm, Manufacturer="Wurth Elektronik", Operating Temperature=-40to85degC, Rated Current=3A, Working Voltage=125VAC, Datasheet URL=https://katalog.we-online.de/em/datasheet/6180xx25023.pdf, Gender=Male, Manufacturer URL=http://www.we-online.de, Mounting Technology=THT, Orientation=Vertical, Package Reference=61800925023, Packaging=Tray, Part Number=61800925023, Pin Number=9, Publisher=WurthElektronik
J2 J3 J4: "Connector", Manufacturer_Name=Amass, Height=5mm
  J2 J3: Datasheet Link=https://www.tme.eu/sl/Document/ce4077e36b79046da520ca73227e15de/XT30PW%20SPEC.pdf, Manufacturer_Part_Number=XT30PW-M
  J4: Datasheet Link=https://www.tme.eu/Document/ce4077e36b79046da520ca73227e15de/XT30PW%20SPEC.pdf, Manufacturer_Part_Number=XT30PW-F
J5 J6: library part CMP-09396-000004-1, "CONN RCPT FMALE 8POS GOLD SOLDER", Current Rating=500mA, Max Operating Temperature=70°C, Min Operating Temperature=-40°C, Package Quantity=20, Ratings=IP67, Voltage Rating=48V, Connector Type=Receptacle, Contact Gender=Female, Contact Plating=Gold, Fastening Type=Twist, Gender=Female, Housing Material=Zinc, Lead Free="Lead Free", Mount=Panel, Number of Contacts=8, Number of Positions=8, Orientation=Straight, Packaging=Bulk, REACH SVHC="No SVHC", Series=PLUSCON, Termination=Solder, Thread Size=M12, Wire/Cable Diameter=6mm
JADC1 JADC2 JPyro1 JValve1: library part CMP-1502-00278-1, "Male PCB Connector WR-DSUB, Vertical, 25 pins", Contact Resistance=30mOhm, Manufacturer="Wurth Elektronik", Operating Temperature=-40to85degC, Rated Current=3A, Working Voltage=125VAC, Datasheet URL=https://katalog.we-online.de/em/datasheet/6180xx25023.pdf, Gender=Male, Manufacturer URL=http://www.we-online.de, Mounting Technology=THT, Orientation=Vertical, Package Reference=61802525023, Packaging=Tray, Part Number=61802525023, Pin Number=25, Publisher=WurthElektronik
JALT: "Connector", Manufacturer_Name=Sullins, Datasheet Link=https://drawings-pdf.s3.amazonaws.com/10492.pdf, Height=8.7mm, Manufacturer_Part_Number=PPTC071LFBN-RC
JIMU: "Connector", Manufacturer_Name=Adafruit, Datasheet Link=https://learn.adafruit.com/downloads/pdf/adafruit-bno055-absolute-orientation-sensor.pdf, Height=2mm, Manufacturer_Part_Number=00472
L1: library part IHLP3232DZER220M11, "Inductor， IHLP3232DZER220M11, 3.3A sat", Manufacturer_Name=Vishay, Mouser Part Number=70-IHLP3232DZER220M1, Arrow Part Number=IHLP3232DZER220M11, Arrow Price/Stock=https://www.arrow.com/en/products/ihlp3232dzer220m11/vishay?utm_currency=USD&region=nac, Datasheet Link=http://uk.rs-online.com/web/p/products/8523797, Height=4mm, Manufacturer_Part_Number=IHLP3232DZER220M11, Mouser Price/Stock=https://www.mouser.co.uk/ProductDetail/Vishay-Dale/IHLP3232DZER220M11?qs=Nbmv7C3%2FzlDWnanygNMaBQ%3D%3D
LED1 LED3 LED4 LED5 LED6: library part CMP-007-00041-3, "Chip LED 0402, Green, 0.02 A, 3.1 to 3.7 V, -40 to 80 degC, 2-Pin SMD, RoHS, Tape and Reel", Case/Package=0402, Colour=Green, Mounting Technology=SMT, Pins=2, RoHS Compliant=Yes
LED2: library part CMP-007-00042-3, "Chip LED 0402, Blue, 0.02 A, 3.1 to 3.7 V, -40 to 80 degC, 2-Pin SMD, RoHS, Tape and Reel", Case/Package=0402, Colour=Blue, Mounting Technology=SMT, Pins=2, RoHS Compliant=Yes
P1 P2: library part CMP-1502-00660-2, Color="Beige, White", Contact Resistance=20mΩ, Current Rating=2A, Flammability Rating="UL94 V-0", Insulation Resistance=1GΩ, Max Operating Temperature=85°C, Min Operating Temperature=-40°C, Operating Supply Voltage=100V, Voltage Rating=125V, Connector Type="Male Pin", Contact Gender=Male, Contact Material=Copper, Contact Mating Length=3.5052mm, Contact Plating=Tin, Gender=Male, Height=6.6mm, Housing Material=Nylon, Insulation=Insulated, Lead Pitch=2mm, Length=5mm, Mount="Surface Mount", NexarPartId=18818242, Number of Contacts=2, Number of Pins=2, Number of Positions=2, Number of Rows=1, Orientation=Vertical, Packaging="Tape and Reel", Pitch=2mm, REACH SVHC=Unknown, RoHS=Compliant, Termination=SMD/SMT, Width=7.9mm
P3: library part CMP-2000-05352-1, "Male Header, Pitch 1.27 mm, 2 x 5 Position, Height 6.12 mm, RoHS, Tube", Color=Black, Manufacturer=Samtec, Package Description="Male Header, Pitch 1.27 mm, 2 x 5 Position, Height 5.97 mm, Tail Length 4.32 mm", Package Reference=FTSH-105-01-L-DV-K, Category=Connectors,Interconnects, Connector Type=Header,Shrouded, Contact Finish=Gold, Contact Finish Thickness=3µin(0.08µm), Contact Mating Length="0.120\"(3.05mm)", Contact Type=MalePin, Datasheet URL=http://suddendocs.samtec.com/prints/ftsh-1xx-xx-xxx-dv-xxx-mkt.pdf, Datasheet Version="Rev. ET, 10/1995", Family=RectangularConnectors-Headers,MalePins, Fastening Type=-, Features=-, Manufacturer URL=http://www.samtec.com/, Mounting Type=SurfaceMount, Number of Positions=10, Number of Positions Loaded=All, Number of Rows=2, Package URL=http://suddendocs.samtec.com/prints/ftsh-1xx-xx-xxx-dv-xxx-footprint.pdf, Packaging=Tube, Pitch="0.050\"(1.27mm)", Row Spacing="0.050\"(1.27mm)", Series=FTSH, Termination=Solder
QD1 QD3: library part CMP-02550-000199-1, "Use Si7469DP For PCBA. MOSFET P-CH 40V 11A PPAK SO-8", Continuous Drain Current=-11A, Drain To Source Resistance=0.0075Ω, Drain To Source Voltage=-40V, Gate To Source Voltage=20V, Manufacturer=Vishay, Manufacturer Part Number=SI7463DP-T1-E3, Max Forward Diode Voltage=-1.2V, Max Junction Temp=+150°C, Package=S17-0173-SINGLE, Power Dissipation=1.9W, Pulse Drain Current=-60A, Temperature="-55°C to +150°C", Temperature Range Low=-55°C, Typ Forward Diode Voltage=-0.8V, Automotive=No, Category=Trans, ComponentLink2Description=Datasheet, ComponentLink2URL=http://www.vishay.com/docs/72440/si7463dp.pdf, Depletion Mode=False, Device Class L1="Discrete Semiconductors", Device Class L2=Transistors, Device Class L3=MOSFETs, Digikey Description="MOSFET P-CH 40V 11A PPAK SO-8", Gate Charge At Vgs="121nC @ -10V", Height=1.17mm, Lead Free=Yes, Mouser Description="MOSFET 40V 18.6A 5.4W 9.2mohm @ 10V", Number of Channels=1, Number Of P Channels=1, Octopart=https://octopart.com/si7463dp-t1-e3-vishay-42065245, Reverse Recovery Time=45ns, RoHS=TRUE, Rthja Max=52°C/W, Standoff Height=0mm, Temperature Range High=+150°C, Threshold Vgs Max=-3V, Threshold Vgs Min=-1V, Transconductance=50S, Turn Off Delay Time=200ns, Turn On Delay Time=20ns
QD2: library part CMP-02550-000199-1, "MOSFET P-CH 40V 11A PPAK SO-8", Continuous Drain Current=-11A, Drain To Source Resistance=0.0075Ω, Drain To Source Voltage=-40V, Gate To Source Voltage=20V, Manufacturer=Vishay, Manufacturer Part Number=SI7463DP-T1-E3, Max Forward Diode Voltage=-1.2V, Max Junction Temp=+150°C, Package=S17-0173-SINGLE, Power Dissipation=1.9W, Pulse Drain Current=-60A, Temperature="-55°C to +150°C", Temperature Range Low=-55°C, Typ Forward Diode Voltage=-0.8V, Automotive=No, Category=Trans, ComponentLink2Description=Datasheet, ComponentLink2URL=http://www.vishay.com/docs/72440/si7463dp.pdf, Depletion Mode=False, Device Class L1="Discrete Semiconductors", Device Class L2=Transistors, Device Class L3=MOSFETs, Digikey Description="MOSFET P-CH 40V 11A PPAK SO-8", Gate Charge At Vgs="121nC @ -10V", Height=1.17mm, Lead Free=Yes, Mouser Description="MOSFET 40V 18.6A 5.4W 9.2mohm @ 10V", Number of Channels=1, Number Of P Channels=1, Octopart=https://octopart.com/si7463dp-t1-e3-vishay-42065245, Reverse Recovery Time=45ns, RoHS=TRUE, Rthja Max=52°C/W, Standoff Height=0mm, Temperature Range High=+150°C, Threshold Vgs Max=-3V, Threshold Vgs Min=-1V, Transconductance=50S, Turn Off Delay Time=200ns, Turn On Delay Time=20ns
QFuse1: library part CMP-04962-000088-1, "MOSFET N-CH 40V 159A 8VSON", Continuous Drain Current (ID)=159A, Drain to Source Voltage (Vdss)=40V, Input Capacitance=5.85nF, Max Operating Temperature=150°C, Max Power Dissipation=104W, Min Operating Temperature=-55°C, Element Configuration=Single, Mount="Surface Mount", Number of Pins=8, Packaging="Tape and Reel", Rds On Max=3.5mR, RoHS Compliant=Yes
R1 R2: library part CMP-2000-03092-2, "RES Thick Film, 22kΩ, 1%, 0.1W, 100ppm/°C, 0603", Case Code (Imperial)=0603, Case Code (Metric)=1608, Max Operating Temperature=155°C, Max Power Dissipation=100mW, Min Operating Temperature=-55°C, Package Quantity=10, Resistance=22kR, Temperature Coefficient=100ppm/°C, Tolerance=1%, Voltage Rating=75V, Case/Package=0603, Composition="Thick Film", Contact Plating=Tin, Depth=0.85mm, Features="Automotive AEC-Q200", Height=0.45mm, Lead Free="Lead Free", Length=1.55mm, Military Standard=Not, Mount="Surface Mount", Number of Terminations=2, Packaging="Tape and Reel", Power Rating=100mW, Radiation Hardening=No, Termination=SMD/SMT, Voltage Rating (DC)=75V, Weight=7.1E-05oz, Width=0.85mm
R3 R51 R52 R59 R61: library part CMP-03412-037786-1, "RES SMD 200K OHM 1% 1/10W 0603", Case Code (Imperial)=0603, Case Code (Metric)=1608, Max Operating Temperature=155°C, Max Power Dissipation=100mW, Min Operating Temperature=-55°C, Package Quantity=1, Resistance=200kR, Resistance Tolerance=1%, Resistor Type="Thick Film", Temperature Coefficient=100ppm/°C, Voltage Rating=50V, Case/Package=0603, Construction=Rectangular, Depth=0.8mm, Features="Moisture Resistant", Height=0.022inch, Lead Free="Lead Free", Length=1.6mm, Military Standard=Not, Number of Pins=2, Number of Terminations=2, Packaging="Tape and Reel", Power Rating=100mW, REACH SVHC="No SVHC", RoHS Compliant=Yes, Series=RC, Size Code=0603, Termination=SMD/SMT, Tolerance=1%, Voltage Rating (DC)=50V, Width=0.031inch
R4 R5 R15 Rpl1 Rpl2 RS2_1 RS2_2 RS2_3: library part CMP-009-00066-2, "10K 0.063W 1% 0402 (1005 Metric)  SMD", Case/Package=0402, Power=63mW, Tolerance=1%, Mounting Technology=SMT, Pins=2
R6 R7: library part CMP-2000-03303-1, "CRCW06033K40FKEA Fixed Resistor, Metal Glaze/thick Film, 0.1W, 3400ohm, 75V, 1% +/-Tol, 100ppm/Cel, Surface Mount, 0603", Manufacturer="Vishay Dale", Part Number=CRCW06033K40FKEA